# Altium PCB PCB2.PcbDoc (part 2 of 2)
Units mm, origin at the board's own origin, x right, y up, seen from the top; angles counter-clockwise.
Board outline 105.63 x 88.15 mm, 2 copper layers (Top Layer, Bottom Layer); 104 components, 90 nets, 384 pads, 160 vias.
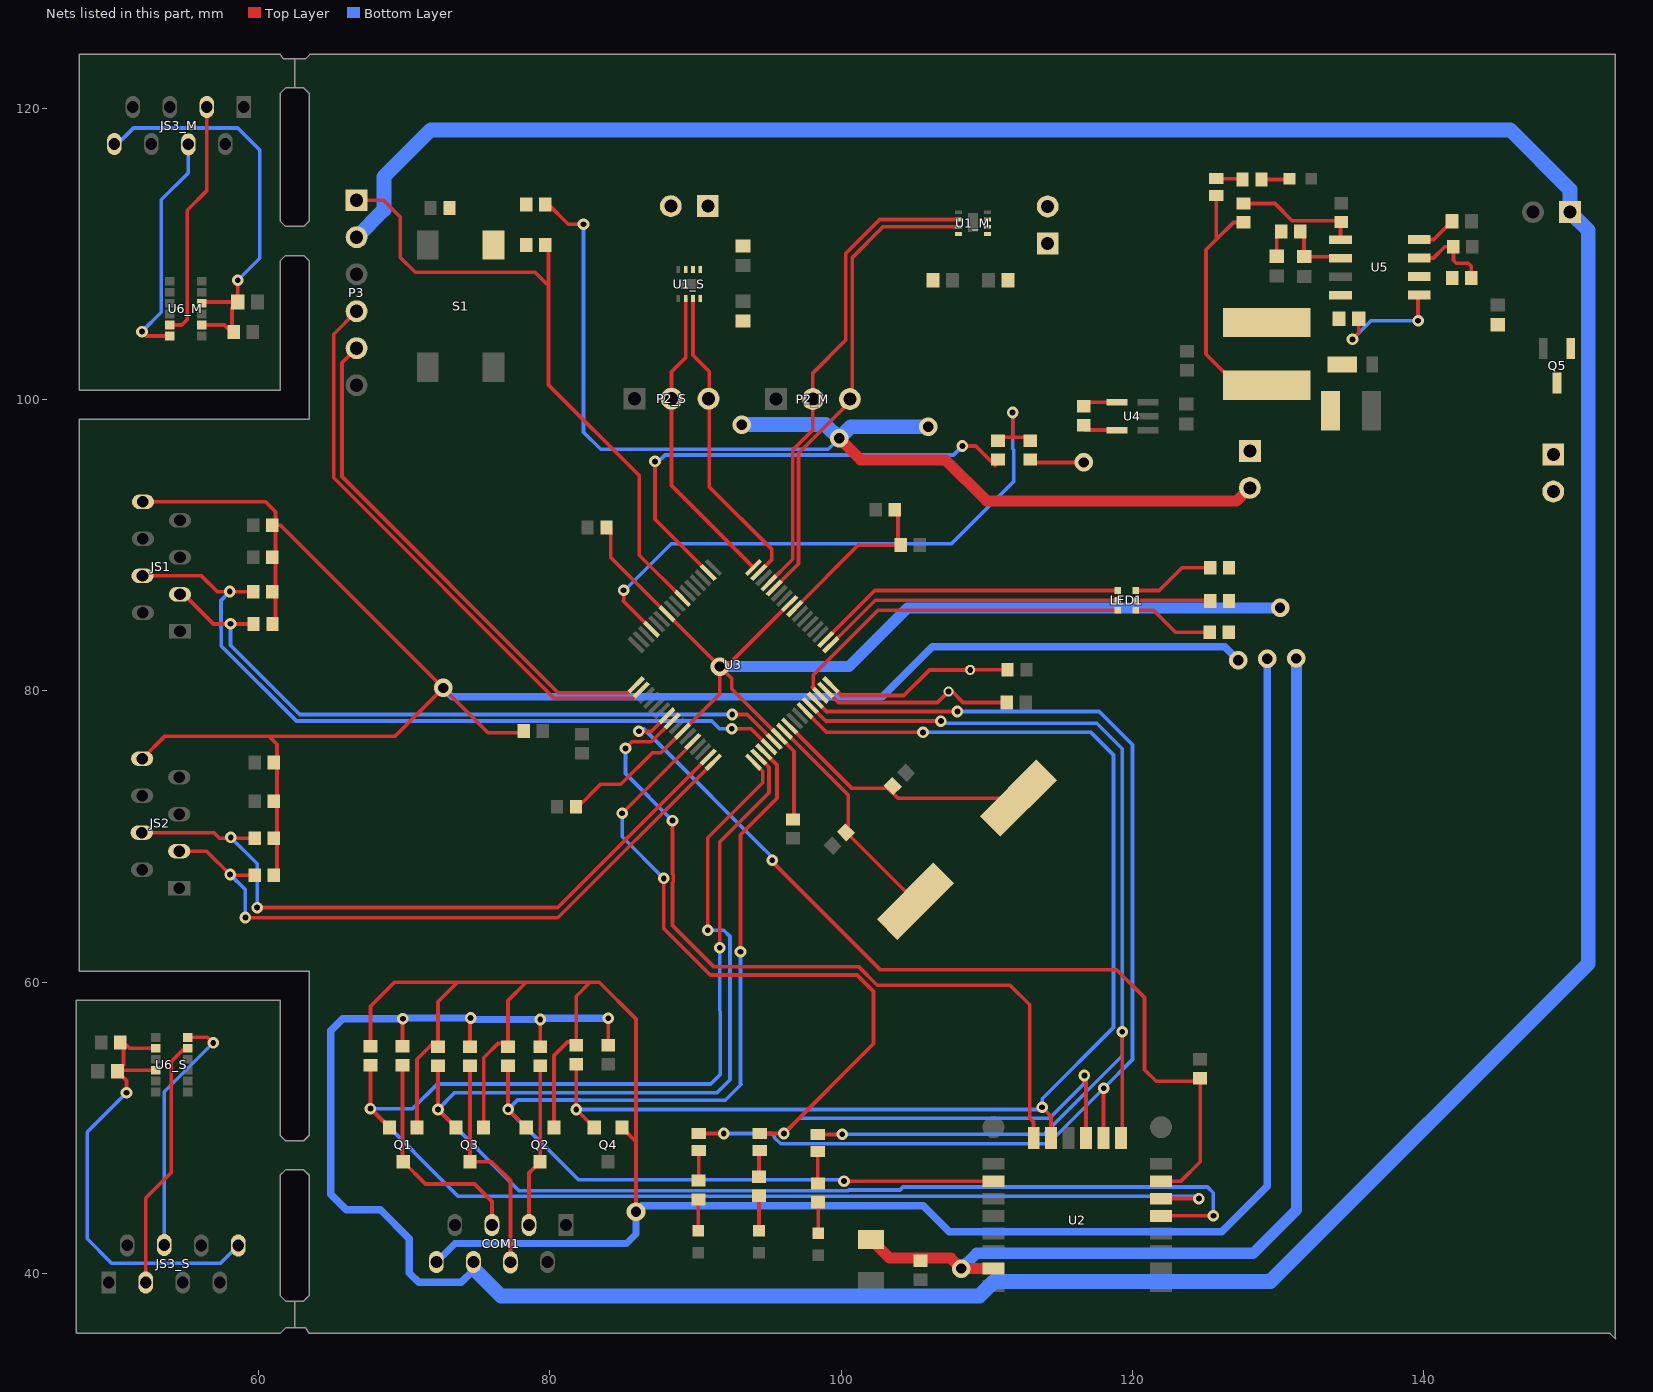
[diagram p2: the nets of this part, all layers, seen from the top]

## Via types
v1: diameter 0.8, hole 0.4, Top Layer to Bottom Layer, 101 vias
v2: diameter 1.27, hole 0.711, Top Layer to Bottom Layer, 27 vias
v3: diameter 0.5, hole 0.5, Top Layer to Bottom Layer, 24 vias
v4: diameter 3, hole 2.54, Top Layer to Bottom Layer, 8 vias

## Nets (pads, with @x,y where several pads share a name; then routed paths per layer and width w, separated by ;. In a path a pad name is that pad's centre, name@x,y a point inside that pad or via, vN(x,y) a via of type N, cw(c..) or ccw(c..) an arc to the next point about the centre after c; other vN are vias at no path point) (continued)
LED_B: LED1.6 U3.46 | length 24.4
  Top Layer w0.254: U3.46@98.59,79.703 98.025,80.269 98.093,80.336 98.089,80.341 98.089,81.089 102.536,85.536 LED1.6@118.974,85.536
LED_G: LED1.4 U3.50 | length 21.4
  Top Layer w0.254: U3.50@98.944,83.522 102.308,86.886 LED1.4@118.974,86.886
LED_R: LED1.5 U3.49 | length 20.9
  Top Layer w0.254: U3.49@99.297,83.168 102.34,86.211 LED1.5@118.974,86.211
NetC15_1: C15.1 R5.1 R10.2 S1.1
NetC17_1: C17.1 U5.1 | length 8.4
  Top Layer w0.254: v1(135.1,104.125) 135.525,104.55 C17.1@135.525,105.55 ; v1(139.6,105.4) 139.6,107.095 U5.1@139.675,107.17
  Bottom Layer w0.254: v1(135.1,104.125) 136.375,105.4 v1(139.6,105.4)
NetC17_2: C17.2 D5.1 L1.1 U5.8
NetC18_1: C18.1 Q5.3 R28.2 U5.2 W2.1
NetC19_1: C19.1 L1.2 ON.1 R27.2 W1.1 | length 19.3
  Top Layer w0.254: ON.1@125.75,114 125.75,110.975 ; W1.1@127.53,96.994 W1.1@128.053,96.471 ; R27.2@127.625,112.15 126.925,112.15 125.75,110.975 ; L1.2@129.2,100.975 127.175,100.975 125.05,103.1 125.05,110.275 125.75,110.975
NetC20_1: C20.1 R29.2 U5.6 | length 4.4
  Top Layer w0.254: R29.2@131.5,111.525 131.775,111.25 C20.1@131.775,109.8 134.16,109.8 U5.6@134.275,109.685
NetC21_1: C21.1 R29.1 | length 1.8
  Top Layer w0.254: C21.1@129.9,109.825 129.9,111.225 R29.1@130.2,111.525
NetC22_1: C22.1 U5.4 | length 2.8
  Top Layer w0.254: U5.4@139.675,110.98 140.68,110.98 C22.1@141.925,112.225
NetCB1_2: connected.2 R3.2 | length 2.3
  Top Layer w0.254: R3.2@98.407,46.117 R3.2@98.407,46.192 connected.2@98.407,48.396
NetCB2_2: R2.2 Tx/Rx.2 | length 2.2
  Top Layer w0.254: R2.2@90.225,46.317 R2.2@90.225,46.392 Tx/Rx.2@90.225,48.469
NetCB3_2: awake.2 R1.2 | length 1.9
  Top Layer w0.254: R1.2@94.364,46.571 R1.2@94.364,46.646 94.364,48.409 awake.2@94.424,48.469
NetCB4_2: ON.2 R26.1 | length 1.8
  Top Layer w0.254: ON.2@125.75,115.15 127.5,115.15 R26.1@127.55,115.1
NetD1_1: D1.1 R1.1 | length 2.5
  Top Layer w0.254: D1.1@94.364,42.936 R1.1@94.364,45.346 R1.1@94.364,45.421
NetD2_1: D2.1 R2.1 | length 2.2
  Top Layer w0.254: D2.1@90.199,42.936 R2.1@90.199,45.141
NetD3_1: D3.1 R3.1 | length 2.2
  Top Layer w0.254: D3.1@98.442,42.766 R3.1@98.442,44.932
NetD4_1: D4.1 R26.2 | length 1.9
  Top Layer w0.254: R26.2@128.85,115.1 130.725,115.1 D4.1@130.775,115.15
NetLED1_1: LED1.1 R33.1 | length 5.5
  Top Layer w0.254: LED1.1@120.224,85.536 121.439,85.536 122.954,84.021 R33.1@125.088,84.021
NetLED1_2: LED1.2 R34.1 | length 4.9
  Top Layer w0.254: LED1.2@120.224,86.211 125.064,86.211 R34.1@125.1,86.175
NetLED1_3: LED1.3 R35.1 | length 5.5
  Top Layer w0.254: LED1.3@120.224,86.886 121.836,86.886 123.4,88.45 R35.1@125.1,88.45
NetP1_M_1: P1_M.1 U1_M.2
NetP1_M_2: P1_M.2 U1_M.3
NetP1_S_1: P1_S.1 U1_S.2
NetP1_S_2: P1_S.2 U1_S.3
NetR27_1: R27.1 R32.2 U5.5 | length 8.4
  Top Layer w0.254: R27.1@127.625,113.45 129.775,113.45 130.971,112.254 134.275,112.254 U5.5@134.275,110.955
NetR28_1: R28.1 R31.2 U5.3 | length 5.8
  Top Layer w0.254: U5.3@139.675,109.71 140.66,109.71 141.425,110.475 R31.2@142.025,110.475 142.025,109.55 142.225,109.35 143.05,109.35 143.25,109.15 R28.1@143.25,108.325
NSLEEP1: P2_M.3 U1_M.7 U3.60 | length 33.2
  Top Layer w0.254: U3.60@95.408,87.057 97.075,88.724 97.075,96.3 100.395,99.62 100.605,99.62 100.775,99.79 100.775,109.75 102.879,111.854 U1_M.7@108.056,111.854
NSLEEP2: P2_S.3 U1_S.7 U3.63 | length 21.4
  Top Layer w0.254: U1_S.7@89.834,106.922 89.834,103.041 90.95,101.925 90.95,94 95.25,89.7 95.25,89.02 U3.63@94.347,88.118
OSC1: C11.1 U3.39 Y1.2 | length 15.4
  Top Layer w0.254: U3.39@96.115,77.229 100.494,72.85 100.494,70.163 Y1.2@105.094,65.563
OSC2: C12.1 U3.40 Y1.1 | length 17.9
  Top Layer w0.254: U3.40@96.469,77.582 100.745,73.306 C12.1@103.225,73.306 ; C12.1@103.381,73.306 C12.1@103.225,73.306 ; Y1.1@112.165,72.634 103.898,72.634 C12.1@103.225,73.306
PGC2: P3.5 U3.17 | length 35.8
  Top Layer w0.254: P3.5@66.75,103.515 65.746,102.511 65.746,94.704 80.575,79.875 85.397,79.875 U3.17@85.933,80.411
PGD2: P3.4 U3.18 | length 39.7
  Top Layer w0.254: P3.4@66.75,106.055 65.175,104.48 65.175,94.625 80.306,79.494 85.724,79.494 U3.18@86.286,80.057
PH1: P2_M.2 U1_M.6 U3.61 | length 33.5
  Top Layer w0.254: U3.61@95.055,87.411 96.675,89.031 96.675,96.525 98.065,97.915 P2_M.2@98.065,100.025 98.065,101.815 100.325,104.075 100.325,110.025 102.654,112.354 U1_M.6@108.056,112.354
PH2: P2_S.2 U1_S.6 U3.64 | length 21.2
  Top Layer w0.254: U1_S.6@89.334,106.922 89.334,102.87 88.365,101.901 P2_S.2@88.365,100.05 88.365,94.1 U3.64@93.994,88.472
PIO1: connected.1 U2.10 U3.44 | length 74.1
  Top Layer w0.254: U3.44@97.883,78.996 98.979,77.9 99.004,77.925 v1(106.85,77.925) ; connected.1@98.407,49.546 100.046,49.546 v1(100.075,49.575) ; U2.10@119.3,49.392 v1(119.3,56.6)
  Bottom Layer w0.254: v1(100.075,49.575) 113.925,49.575 119.3,54.95 v1(119.3,56.6) 119.3,76.025 117.55,77.775 107,77.775 v1(106.85,77.925)
PIO2: Tx/Rx.1 U2.11 U3.45 | length 80.6
  Top Layer w0.254: Tx/Rx.1@90.225,49.619 v1(91.944,49.619) v1@91.975,49.65 ; U3.45@98.237,79.35 99.032,78.554 99.057,78.579 v1@107.98,78.579 ; U2.11@118.012,49.304 118.012,52.712 v1(118.025,52.725)
  Bottom Layer w0.254: v1(91.944,49.619) 95.227,49.619 95.421,49.425 95.421,49.354 95.854,48.921 114.221,48.921 v1(118.025,52.725) 120,54.7 120,76.3 117.722,78.578 v1(107.98,78.578)
PIO3: awake.1 U2.12 U3.28 | length 72.9
  Top Layer w0.254: v1(84.975,71.596) 89.822,76.443 U3.28@89.822,76.521 ; v1(87.829,67.128) 87.829,63.696 91.025,60.5 101.1,60.5 102.225,59.375 102.225,55.775 v1(96.075,49.625) 96.069,49.619 awake.1@94.424,49.619 ; U2.12@116.812,49.304 v1@116.812,53.488
  Bottom Layer w0.254: v1(84.975,71.596) 84.975,69.982 v1(87.829,67.128) ; v1(96.075,49.625) 97.125,50.675 114.3,50.675 116.7,53.075 v1(116.7,53.6)
RST: P3.1 R10.1 U3.7 | length 45.1
  Top Layer w0.254: P3.1@66.75,113.675 68.6,113.675 69.75,112.525 69.75,109.75 70.775,108.725 79,108.725 79.825,107.9 ; R10.1@79.925,110.6 79.925,101 86.15,94.775 86.15,89.315 U3.7@89.115,86.35
RTS: COM1.6 Q2.1 R9.1 | length 11
  Top Layer w0.254: COM1.6@78.58,43.345 78.58,46.914 Q2.1@79.345,47.679 ; Q2.1@79.352,47.686 R9.1@79.352,54.05
RX: COM1.4 Q1.1 R7.1 | length 15.2
  Top Layer w0.254: R7.1@69.902,54.075 69.902,47.724 Q1.1@69.947,47.679 71.476,46.15 74.85,46.15 76.04,44.96 COM1.4@76.04,43.345
SCL1: JS1.6 R17.1 U3.37 | length 47.2
  Top Layer w0.254: JS1.6@54.624,86.621 54.904,86.621 56.932,84.593 R17.1@59.45,84.593 ; v1(92.525,78.375) 93.555,78.375 U3.37@95.408,76.521
  Bottom Layer w0.254: v1(58.092,84.61) 58.092,83.133 62.85,78.375 v1(92.525,78.375)
SCL2: JS2.6 R21.1 U3.32 | length 45.6
  Top Layer w0.254: JS2.6@54.573,68.996 56.454,68.996 58.105,67.345 R21.1@59.54,67.345 ; v1@59.1,64.425 80.554,64.425 U3.32@91.236,75.107
  Bottom Layer w0.254: v1(58.067,67.392) 59.117,66.342 v1(59.117,64.442)
SCL_S_M: JS3_M.6 U6_M.5 | length 16.5
  Top Layer w0.254: U6_M.5@53.919,105.106 54.744,105.106 55.119,105.481 55.119,112.981 56.474,114.336 JS3_M.6@56.474,120.076
SCL_S_S: JS3_S.6 U6_S.5 | length 17.4
  Top Layer w0.254: JS3_S.6@52.276,39.397 52.276,45.187 54.031,46.942 54.031,54.567 54.93,55.467 U6_S.5@55.156,55.467
SDA1: JS1.5 R18.1 U3.36 | length 52.3
  Top Layer w0.254: JS1.5@52.054,87.891 56.109,87.891 57.203,86.797 R18.1@59.439,86.797 ; v1(92.5,77.4) 93.822,77.4 U3.36@95.055,76.168
  Bottom Layer w0.254: v1(58.042,86.814) 57.438,86.21 57.438,84.339 57.45,84.327 57.45,83.1 62.625,77.925 91.125,77.925 91.65,77.4 v1(92.5,77.4)
SDA2: JS2.5 R22.1 U3.31 | length 48.5
  Top Layer w0.254: JS2.5@52.003,70.266 56.959,70.266 57.34,69.885 R22.1@59.54,69.885 ; v1(59.925,65.125) 80.547,65.125 U3.31@90.883,75.461
  Bottom Layer w0.254: v1(58.117,69.942) 59.925,68.135 v1(59.925,65.125)
SDA_S_M: JS3_M.5 U6_M.6 | length 16.2
  Top Layer w0.254: v1(52.019,104.656) 52.319,104.356 U6_M.6@53.919,104.356
  Bottom Layer w0.254: v1(52.019,104.656) 53.35,105.988 53.35,113.713 55.204,115.566 JS3_M.5@55.204,117.506
SDA_S_S: JS3_S.5 U6_S.6 | length 17.2
  Top Layer w0.254: U6_S.6@55.156,56.217 56.531,56.217 v1(56.906,55.842)
  Bottom Layer w0.254: JS3_S.5@53.546,41.967 53.546,52.482 v1(56.906,55.842)
SOSCI: C13.1 U3.47 Y2.1 | length 13.2
  Top Layer w0.254: U3.47@98.944,80.057 99.801,79.2 106.622,79.2 Y2.1@107.376,79.954 107.621,79.954 108.375,79.2 C13.1@111.15,79.2
SOSCO: C14.1 U3.48 Y2.2 | length 12.9
  Top Layer w0.254: U3.48@99.297,80.411 100.033,79.675 104.3,79.675 106.063,81.438 Y2.2@108.861,81.438 108.872,81.45 C14.1@111.2,81.45
TX: COM1.5 Q3.1 R12.1 | length 15.3
  Top Layer w0.254: Q3.1@74.519,47.679 76.021,47.679 77.31,46.39 COM1.5@77.31,40.775 ; Q3.1@74.536,47.695 R12.1@74.536,54.05
U1CTS: Q4.3 R13.1 U2.14 U3.43 | length 87.7
  Top Layer w0.254: R13.1@81.819,54.15 v1(81.819,51.268) Q4.3@83.058,50.029 ; U3.43@97.529,78.643 99.022,77.15 v1(105.625,77.15) ; v1(113.8,51.425) 114.412,50.813 U2.14@114.412,49.304
  Bottom Layer w0.254: v1(81.819,51.268) 113.643,51.268 v1(113.8,51.425) 113.8,52 118.7,56.9 118.7,75.6 117.15,77.15 v1(105.625,77.15)
U1RTS: Q2.3 R8.1 U2.18 U3.35 | length 80.9
  Top Layer w0.254: R8.1@77.147,54.05 v1(77.147,51.277) Q2.3@78.395,50.029 ; v1(93.1,62.1) 93.1,70.125 95.6,72.625 95.6,74.915 U3.35@94.701,75.814 ; v1(100.204,46.354) U2.18@110.462,46.354
  Bottom Layer w0.254: v1(93.1,62.1) 93.1,53.05 93.15,53 92.05,51.9 82.112,51.9 82.09,51.922 77.792,51.922 v1(77.147,51.277) 81.968,46.456 100.102,46.456 v1(100.204,46.354)
U1RX: Q1.3 R6.1 U2.6 U3.34 | length 115
  Top Layer w0.254: R6.1@67.698,54.075 v1(67.698,51.329) Q1.3@68.997,50.029 ; v1(91.675,62.375) 91.675,69.625 95.05,73 95.05,74.758 U3.34@94.347,75.461 ; U2.6@121.962,45.154 v1(124.554,45.154)
  Bottom Layer w0.254: v1(91.675,62.375) 91.7,53.675 91.05,53.025 72.3,53.025 70.604,51.329 v1(67.698,51.329) 73.707,45.319 124.389,45.319 v1(124.554,45.154)
U1TX: Q3.3 R11.1 U2.5 U3.33 | length 111.3
  Top Layer w0.254: R11.1@72.331,54.05 v1(72.331,51.267) Q3.3@73.569,50.029 ; v1(90.85,63.575) 90.85,69.925 94.625,73.7 94.625,74.476 U3.33@93.994,75.107 ; U2.5@121.962,43.954 121.983,43.975 v1(125.55,43.975)
  Bottom Layer w0.254: v1(90.85,63.575) 91.95,63.575 92.375,63.15 92.375,53.303 91.483,52.411 73.475,52.411 v1(72.331,51.267) 77.898,45.7 100.475,45.7 100.525,45.75 104.05,45.75 104.256,45.956 125.144,45.956 125.55,45.55 v1(125.55,43.975)
VBAT: R24.2 RSENSE1.1 U4.5 W2.2 | length 6
  Top Layer w0.254: R24.2@112.979,95.65 113.004,95.675 v2(116.65,95.675) ; RSENSE1.1@116.65,98 116.75,97.9 U4.5@118.925,97.9
VBAT_GND: R25.1 U3.2 | length 33.9
  Top Layer w0.254: v1(87.225,95.75) 87.225,91.776 U3.2@90.883,88.118 ; v1(108.325,96.8) 109.25,96.8 110.587,95.463 R25.1@110.775,95.65
  Bottom Layer w0.254: v1(87.225,95.75) 87.35,95.625 87.919,96.194 107.719,96.194 v1(108.325,96.8)
VBATSENSE: R24.1 R25.2 U3.13 | length 42
  Top Layer w0.254: v1(85.075,86.9) 85.075,86.197 85.05,86.172 U3.13@86.994,84.229 ; R25.2@110.775,97.4 111.8,97.4 ; v1(111.775,99.1) 111.775,97.425 111.8,97.4 ; R24.1@112.979,97.4 111.8,97.4
  Bottom Layer w0.254: v1(85.075,86.9) 85.15,86.9 88.35,90.1 107.575,90.1 111.85,94.375 111.85,96.55 111.775,96.625 v1(111.775,99.1)
VCAP/VDDCORE: C5.1 C6.1 U3.56 | length 11.3
  Top Layer w0.254: U3.56@96.822,85.643 101.2,90.021 101.221,90 103.875,90 103.9,90.025 C6.1@103.9,92.419
VCC: C1_M.1 C1_S.1 C3.1 C4.1 C7.1 C8.1 C9.1 COM1.1 JS1.1 JS2.1 Q1.2 Q2.2 Q3.2 Q4.2 R5.2 R6.2 R8.2 R11.2 R13.2 R15.2 R16.2 R17.2 R18.2 R19.2 R20.2 R21.2 R22.2 R23.1 R33.2 R34.2 R35.2 U1_M.8 U1_S.8 U2.23 U3.10 U3.26 U3.38 U3.57 W1.2 | length 536.4
  Top Layer w0.254: JS2.1@52.033,75.346 53.562,76.875 60.75,76.875 ; JS1.1@52.084,92.971 60.504,92.971 61.189,92.286 R16.2@61.189,91.369 ; R17.2@61.189,84.603 R16.2@61.189,91.369 ; R21.2@61.29,67.345 61.29,76.335 60.75,76.875 ; R6.2@67.698,55.825 67.698,58.348 69.35,60 73.675,60 ; Q1.2@70.897,50.029 70.897,54.722 71.975,55.8 72.331,55.8 72.331,58.656 73.675,60 ; Q3.2@75.469,50.029 75.469,54.819 76.45,55.8 77.147,55.8 77.147,58.747 78.4,60 ; R23.1@78,77.125 75.775,77.125 v2(72.7,80.2) ; R5.2@79.925,113.375 81.275,112.025 v1(82.325,112.025) ; Q2.2@80.295,50.029 80.295,54.97 81.225,55.9 81.819,55.9 81.819,59.044 82.775,60 ; C8.1@81.956,72.05 83.49,73.584 84.884,73.584 87.05,75.75 87.636,75.75 U3.26@89.115,77.229 91.675,79.789 v2(91.675,81.669) ; C7.1@84.2,91.2 84.2,89.144 U3.10@88.054,85.29 v2(91.675,81.669) ; Q4.2@84.958,50.029 85.925,49.062 ; v2(85.925,44.25) 85.925,49.062 ; 85.931,49.056 85.925,49.062 ; U3.57@96.469,85.997 92.141,81.669 v2(91.675,81.669) ; C9.1@96.732,71.131 96.775,71.173 96.775,75.862 U3.38@95.762,76.875 92.5,80.137 92.5,80.844 v2(91.675,81.669) ; 60.75,76.875 69.375,76.875 72.45,79.95 72.7,79.7 v2(72.7,80.2) ; R16.2@61.189,91.369 61.531,91.369 v2(72.7,80.2) ; 73.675,60 78.4,60 ; 78.4,60 82.775,60 ; 82.775,60 83.4,60 85.925,57.475 85.925,49.062
  Top Layer w0.762: v2(99.875,97.325) 101.35,95.85 107.175,95.85 110,93.025 127.147,93.025 W1.2@128.053,93.931 ; C3.1@102.05,42.35 103.325,41.075 107.525,41.075 v2(108.246,40.354) U2.23@110.462,40.354
  Bottom Layer w0.254: v1(82.325,112.025) 82.325,97.75 83.5,96.575 99.125,96.575 v2(99.875,97.325)
  Bottom Layer w0.508: COM1.1@72.23,40.805 73.5,42.075 85.275,42.075 85.925,42.725 v2(85.925,44.25) 86.325,44.65 105.65,44.65 107.425,42.875 126.125,42.875 129.25,46 v2(129.25,82.2) ; v2(72.7,80.2) 73.3,79.6 102.825,79.6 106.25,83.025 126.325,83.025 v2(127.25,82.1)
  Bottom Layer w0.762: v2(91.675,81.669) 100.544,81.669 104.575,85.7 v2(130.125,85.7) ; v2@108.246,40.35 109.296,41.4 128.275,41.4 131.25,44.375 v2(131.25,82.225)
  Bottom Layer w1.016: v2(93.175,98.275) 98.925,98.275 v2(99.875,97.325) 100.675,98.125 v2(105.975,98.125)
VCCS_M: C23_M.1 C24_M.2 JS3_M.1 U6_M.8 U6_M.10 | length 29
  Top Layer w0.254: U6_M.8@56.119,105.106 57.669,105.106 58.094,104.681 58.194,104.681 58.194,106.286 C24_M.2@58.594,106.686 ; U6_M.10@56.119,106.606 56.198,106.686 C24_M.2@58.594,106.686 ; v1(58.594,108.181) C24_M.2@58.594,106.686
  Bottom Layer w0.254: JS3_M.1@50.124,117.536 50.349,117.536 51.444,118.631 58.594,118.631 60.1,117.125 60.1,109.688 v1(58.594,108.181)
VCCS_S: C23_S.1 C24_S.2 JS3_S.1 U6_S.8 U6_S.10 | length 31.5
  Top Layer w0.254: v1(50.956,52.417) 50.956,53.263 C24_S.2@50.331,53.888 C24_S.2@50.41,53.967 ; U6_S.10@52.956,53.967 C24_S.2@50.41,53.967 ; U6_S.8@52.956,55.467 51.156,55.467 50.756,55.867 50.756,54.313 C24_S.2@50.41,53.967
  Bottom Layer w0.254: v1(50.956,52.417) 48.256,49.717 48.256,42.392 49.931,40.717 57.406,40.717 JS3_S.1@58.626,41.937
VIN: COM1.3 P3.2 POWER_IN.1 Q5.1 R7.2 R9.2 R12.2 R14.2 | length 281.2
  Top Layer w0.254: R7.2@69.902,55.825 69.902,57.477 v1(69.925,57.5) ; R12.2@74.536,55.8 v1@74.536,57.411 ; R9.2@79.352,55.8 v1(79.352,57.448) ; R14.2@84.024,55.9 v1@84.024,57.524
  Bottom Layer w0.254: v1(69.925,57.5) v1@69.975,57.55 ; v1(74.575,57.55) v1@74.677,57.448 ; COM1.3@74.77,40.355 COM1.3@74.77,40.805
  Bottom Layer w0.508: v1(69.925,57.5) 65.8,57.5 64.975,56.675 64.975,45.45 66.038,44.388 68.387,44.388 70.375,42.4 70.375,40.05 71.025,39.4 73.925,39.4 COM1.3@74.77,40.245 ; v1@69.975,57.55 v1(74.575,57.55) ; v1@74.677,57.448 v1(79.352,57.448) ; v1@79.432,57.527 v1(84.022,57.527)
  Bottom Layer w1.016: P3.2@66.75,111.135 68.625,113.01 68.625,115.275 71.85,118.5 145.925,118.5 150.024,114.401 POWER_IN.1@150.024,112.854 151.275,111.603 151.275,61.275 129.465,39.465 110.49,39.465 109.5,38.475 76.65,38.475 COM1.3@74.88,40.245
VM: C2_M.2 C2_S.2 RSENSE1.2 U1_M.1 U1_S.1 U4.4 | length 2.3
  Top Layer w0.254: RSENSE1.2@116.65,99.75 116.7,99.8 U4.4@118.925,99.8
WAKE_HW: U2.15 U3.24 | length 53.6
  Top Layer w0.254: v1(85.2,76.05) 85.65,76.5 86.972,76.5 U3.24@88.408,77.936 ; v1(88.433,71.092) 88.433,67.449 88.483,67.399 88.483,66.857 88.433,66.807 88.433,63.892 91.25,61.075 101.2,61.075 102.475,59.8 111.6,59.8 112.95,58.45 112.95,50.675 113.212,50.413 U2.15@113.212,49.304 U2.15@113.167,49.304
  Bottom Layer w0.254: v1(85.2,76.05) 85.2,74.325 v1(88.433,71.092)
WAKE_SW: R4.1 U2.7 U3.23 | length 62.9
  Top Layer w0.254: v1(86.125,77.225) 86.99,77.225 U3.23@88.054,78.289 ; v1(95.275,68.375) 95.225,68.325 102.7,60.85 118.925,60.85 120.825,58.95 120.825,54 121.625,53.2 R4.1@124.625,53.2 ; U2.7@121.962,46.354 123.329,46.354 124.65,47.675 R4.1@124.65,53.2
  Bottom Layer w0.254: v1(86.125,77.225) 86.469,77.225 86.469,77.381 87.95,75.9 94.356,69.494 95.275,68.575 v1(95.275,68.375)
pads on no net: COM1.8 JS3_M.7 JS3_M.8 JS3_S.7 JS3_S.8 P3.6 S1.3 S1.4 U2.0 U2.2 U2.3 U2.4 U2.13 U2.17 U2.19 U2.20 U2.21 U2.22 U3.3 U3.4 U3.5 U3.6 U3.8 U3.11 U3.12 U3.21 U3.22 U3.29 U3.30 U3.42 U3.51 U3.58 U3.59 U6_M.2 U6_M.3 U6_M.7 U6_M.11 U6_S.2 U6_S.3 U6_S.7 U6_S.11
copper on no net:
  other v3: 61.225,36.35 63.75,36.375 61.225,37.225 63.75,37.225 61.25,38.025 63.75,38.025 61.175,47.275 63.7,47.3 61.175,48.15 63.7,48.15 61.2,48.95 63.7,48.95 61.2,110.125 63.775,110.15 61.2,110.975 63.775,111 61.225,111.8 63.775,111.8 61.225,121.5 63.75,121.525 61.225,122.375 63.75,122.375 61.25,123.175 63.75,123.175
  other v4: 67.975,40.275 147.975,40.275 51,48.45 57.75,48.45 57.75,112.5 67.975,120.275 147.975,120.275

## Polygon pours and split planes (outlines as drawn)
NetC19_1 on Top Layer "Top Layer-No Net 1" (solid, pour order 92): 126.275,101.575 126.275,95.641 134.45,95.641 134.45,100.85 132.7,100.85 132.7,101.575
NetP1_S_1 on Top Layer "NETP1_S_1_L01_P080" (solid, pour order 80): 89.675,108.775 89.675,114.275 92.025,114.275 92.025,110.921 90,109.935 90,108.775
NetP1_S_2 on Top Layer "NETP1_S_2_L01_P078" (solid, pour order 78): 89.475,108.75 89.475,114.5 87.125,114.5 87.125,110.956 89.175,109.958 89.175,108.75
VCC on Top Layer "VCC_L01_P046" (solid, pour order 46): 89.834,107.275 90.725,107.275 92.125,105.875 93.975,105.875 93.975,97.4 92.375,97.4 92.375,103.775 89.834,106.316
GND on Top Layer "GND_L01_P044" (solid, pour order 44): 92.45,105.925 91.075,107.3 88.625,107.3 88.625,105.925 87.025,105.975 87.025,110.025 88.625,110.025 88.625,109.25 89.275,109.25 89.275,108.7 90.975,108.7 92.125,109.85 97.25,109.85 97.25,105.925
VCC on Top Layer "VCC_L01_P042" (solid, pour order 42): 106.7,97.175 106.7,109.65 108.325,111.275 108.325,111.475 107.028,111.475 105.2,109.647 105.2,97.175
GND on Top Layer "GND_L01_P038" (solid, pour order 38): 107,109.55 108.375,110.925 108.375,113.375 107,113.375 107,114.975 111.1,114.975 111.1,113.375 110.325,113.375 110.325,112.854 109.775,112.854 109.775,111.025 110.775,110.025 110.775,105.9 107,105.9
VM on Top Layer "VM_L01_P028" (solid, pour order 28): 90.212,108.681 90.237,108.656 90.562,108.656 90.887,108.656 92.237,110.006 92.262,109.981 94.262,109.981 94.262,110.431 100.182,116.35 103.575,116.35 103.575,118.225 98.607,118.225 90.212,109.831
VM on Top Layer "VM_L01_P026" (solid, pour order 26): 110.925,107.5 111.725,107.5 115.725,103.5 117.65,103.5 117.65,115.3 114.73,118.219 103.425,118.225 103.425,116.35 113.488,116.35 115.672,114.166 115.696,109.225 112.9,109.225 110.625,111.5 109.8,111.5 109.8,111.25 110.925,110.125
GND on Top Layer "GND_L01_P074" (solid, remove dead copper, pour order 74): 87.825,56.075 126.1,56.075 126.1,37.05 87.825,37.05
GND on Top Layer "Top Layer-No Net" (solid, pour order 86): 146.375,102.8 146.375,106.025 142.925,106.025 142.925,111.616 138.5,111.616 138.466,104.35 140.175,104.35 140.175,95.325 135.475,95.325 135.475,101.6 136.075,101.6 136.075,104.9 135.775,104.9 135.775,112.9 131.7,112.9 131.7,115.9 144.975,115.9 148.35,112.525 148.35,102.8
NetC17_2 on Top Layer "Top Layer-No Net 1" (solid, pour order 90): 126.725,102.375 126.725,104.45 125.75,104.45 125.75,107.825 134.95,107.825 134.95,105.5 134.95,101.2 132.9,101.2 132.9,102.375
GND on Top Layer "GND_L01_P072" (solid, remove dead copper, pour order 72): 49.05,97.775 49.05,61.575 64.85,61.575 64.85,37.05 87.8,37.05 87.8,56.025 103.25,56.025 103.25,59.575 96,66.825 93.3,66.825 93.3,77.45 115.95,77.45 115.95,85.375 107.15,85.375 107.15,94.75 81.4,94.75 81.4,118.175 64.85,118.175 64.85,97.775
GND on Top Layer "GND_L01_P016" (solid, pour order 16): 97.6,75.2 97.75,70.25 96,70.25 96,68.5 103,61.5 106.175,61.5 115.875,70.75 115.875,74.375 115.875,76.3 98.71,76.3
GNDS_S on Top Layer "GNDS_S_L01_P064" (solid, pour order 64): 47.85,57.6 60.581,57.6 60.581,36.55 47.85,36.55
GNDS_M on Top Layer "GNDS_M_L01_P076" (solid, pour order 76): 48.319,121.981 61,121.981 61,112.525 60.625,112.25 60.625,109.5 61,109.125 61,102.025 48.319,102.025
AGND on Top Layer "AGND_L01_P066" (solid, pour order 66): 117.889,102.575 124.85,102.575 124.85,96.8 117.904,96.8
VM on Top Layer "VM_L01_P024" (solid, pour order 24): 117.075,99.125 116.2,99.125 116.2,100.225 115.725,100.7 115.725,103.5 117.65,103.5 117.65,100.75 117.075,100.175
VBAT on Top Layer "VBAT_L01_P020" (solid, pour order 20): 115.975,98.6 116,98.575 117.325,98.575 117.325,97.25 117.575,97 117.575,94.2 115.7,94.2 115.7,97 115.975,97.275
VCC on Top Layer "VCC_L01_P010" (solid, pour order 10): 132.3,80.875 132.3,93.275 132.25,93.275 130.325,95.2 130.125,95.4 126.325,95.4 126.325,80.875
VIN on Top Layer "VIN_L01_P068" (solid, pour order 68): 148.925,113.975 148.925,104.675 150.099,103.502 151.2,104.675 151.2,113.975
NetC18_1 on Top Layer "NETC18_1_L01_P004" (solid, pour order 4): 138.833,108.9 138.833,107.95 140.725,107.95 140.725,99.862 140.725,95.037 144.202,95.037 149.702,95.037 149.702,102.212 146,102.212 146,105.65 142.565,105.65 142.635,108.9
NetC15_1 on Top Layer "NETC15_1_L01_P052" (solid, pour order 52): 72.65,113.85 78.75,113.85 78.75,109.975 78.625,110.1 72.625,110.1
NetP1_M_2 on Top Layer "NETP1_M_2_L01_P084" (solid, pour order 84): 109.837,112.175 115.362,112.175 115.362,114.25 111.922,114.25 111.097,112.555 109.837,112.555
NetP1_M_1 on Top Layer "NETP1_M_1_L01_P094" (solid, pour order 94): 109.95,112.025 115.45,112.025 115.45,109.675 112.096,109.675 111.11,111.7 109.95,111.7
GND on Bottom Layer "GND_L02_P050" (solid, remove dead copper, pour order 50): 148.45,118.363 148.45,114.225 143.35,114.225 143.35,115.25 81.075,115.25 81.075,94.775 99.975,94.775 99.975,92.5 81.075,92.5 81.075,89.875 56.35,89.875 56.35,75.55 57.775,75.55 57.775,88.175 76.775,88.175 82.025,82.925 97.625,82.925 102.875,88.175 134.875,88.175 134.875,39.125 64.675,39.125 64.675,61.575 49.125,61.575 49.125,97.875 64.15,97.875 64.15,107.169 69.581,112.6 69.581,117.144 70.8,118.363
GND on Bottom Layer "GND_L02_P036" (solid, pour order 36): 126.411,112.286 128.525,114.4 148.5,114.4 148.454,106.275 140.225,106.275 140.225,100.824 140.225,95.3 130.025,95.3 130.025,98.225 126.411,98.225
VBAT on Bottom Layer "VBAT_L02_P012" (solid, pour order 12): 150.05,94.9 150.05,92.625 147.8,90.375 117.275,90.375 115.7,91.95 115.7,96.4 115.75,96.45 117.574,96.429 117.574,93.286 118.486,92.5 144.425,92.5 144.425,94.9
GND on Bottom Layer "GND_L02_P030" (solid, pour order 30): 107.05,115 107.05,105.9 111.125,105.9 111.125,115
GND on Bottom Layer "GND_L02_P034" (solid, pour order 34): 87.025,105.925 126.8,105.925 126.8,110 87.025,110
AGND on Bottom Layer "AGND_L02_P048" (solid, pour order 48): 113.675,97.2 113.675,94.125 108.6,89.05 89.175,89.05 86.075,85.95 83.956,85.95 82.025,88.507 82.025,90.2 85.8,90.2 87.512,91.913 105.638,91.913 109.225,95.5 109.225,99.725 110.7,101.2 117.9,101.2 117.9,102.575 124.85,102.575 124.85,97.2
GNDS_M on Bottom Layer "GNDS_M_L02_P060" (solid, pour order 60): 48.394,121.981 60.994,121.981 60.994,112.525 60.625,112.25 60.625,109.5 60.994,109.131 60.994,102.031 48.394,102.031
GNDS_S on Bottom Layer "GNDS_S_L02_P062" (solid, pour order 62): 47.855,57.62 60.536,57.62 60.536,36.57 47.855,36.57

## Silkscreen, mask and mechanical layers (free items; w line width, h text height)
Top Overlay:
  text "1" at 49.175,119.825 h1.52 r180
  text "1" at 53.4,94.175 h1.52 r270
  text "1" at 53.45,76.475 h1.52 r270
  text "JSx / 1. VCC / 2. GND / 3. GPIO 0 / 4. GPIO 1 / 5. SDA / 6. SCL / 7. INT / 8. AIN" at 136.925,61.475 h1.52
  text "COM / 1. VCC / 2. GND / 3. VIN / 4. Rx / 5. Tx / 6. RTS / INT0 / 7. CTS / INT2" at 127.35,42.15 h1.52
  text "1" at 70.85,42.1 h1.52
  text "1" at 59.656,40.267 h1.52

## Dimensions
61.225,111.8 to 61.2,110.975 on Mechanical 1
61.225,111.8 to 61.5,112.25 on Mechanical 1
47.699,100.625 to 47.699,98.625 on Mechanical 1
61.5,121 to 63.5,121 on Mechanical 1
62.5,123.375 to 62.5,121.375 on Mechanical 1